# Altium PCB PCB1.PcbDoc
Units mil, origin at the board's own origin, x right, y up, seen from the top; angles counter-clockwise.
Board outline 2400 x 3960 mil, 2 copper layers (Top Layer, Bottom Layer), stack 61.756 mil thick; 52 components, 26 nets, 137 pads, 5 vias.
Unrouted connection lines stored in the file: 2.
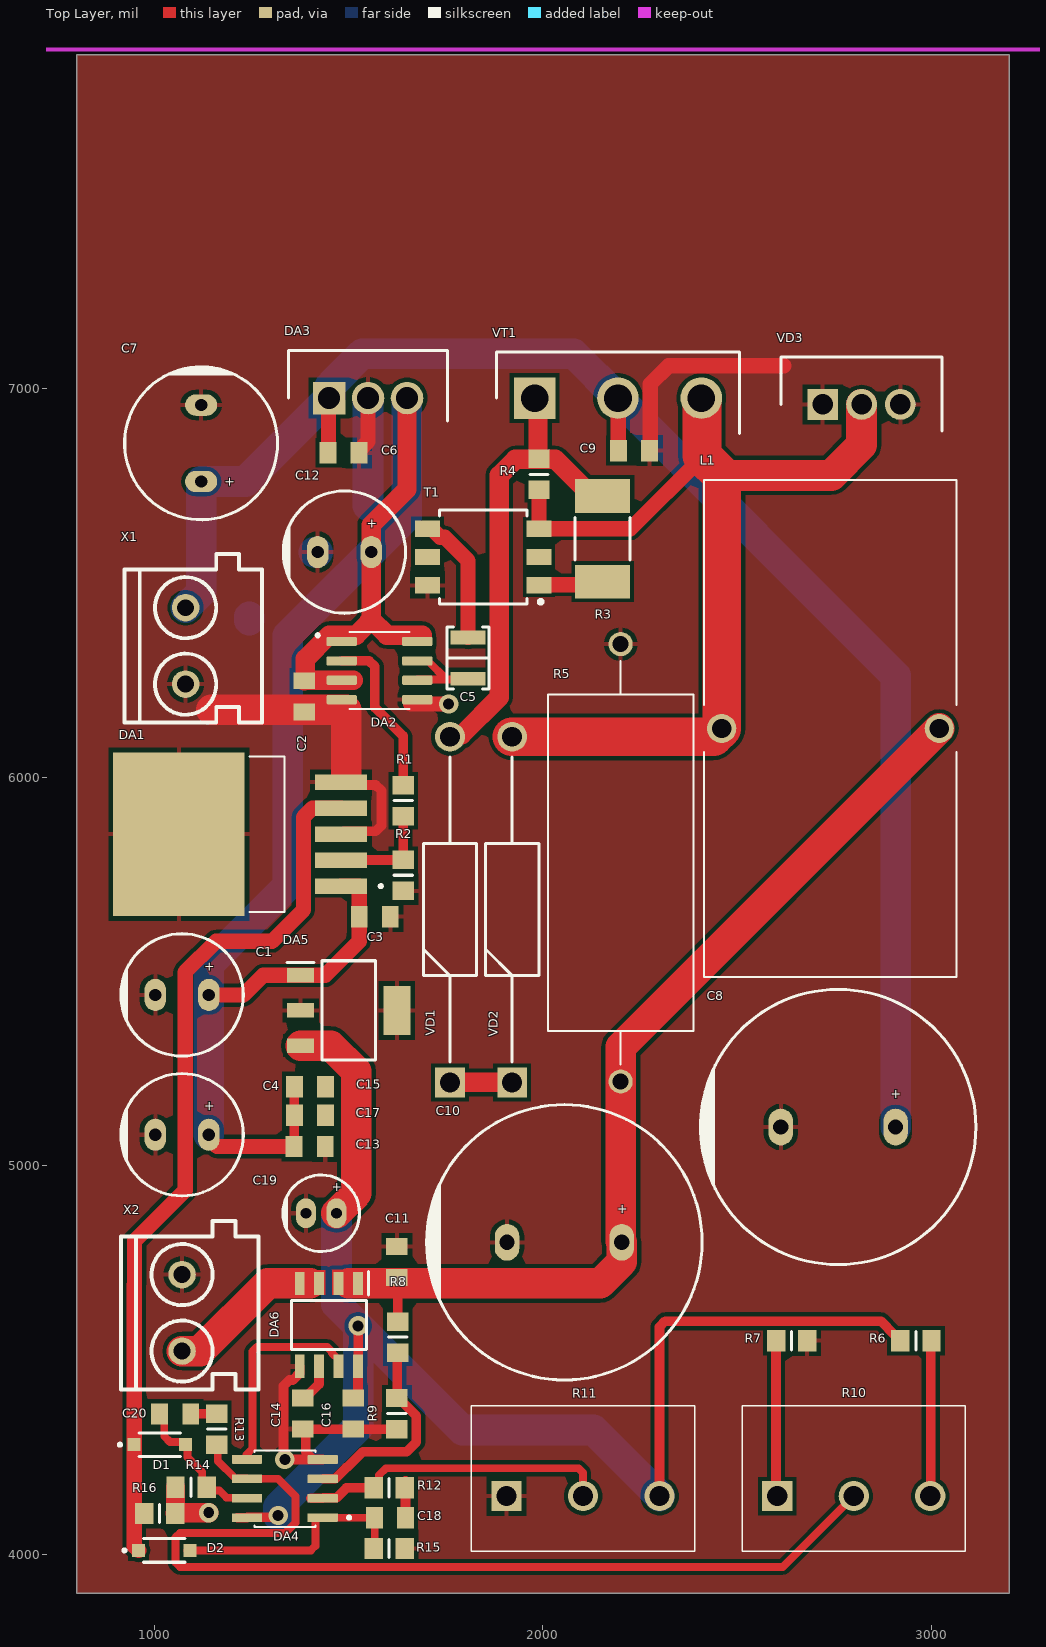
[diagram p0: Top Layer view]
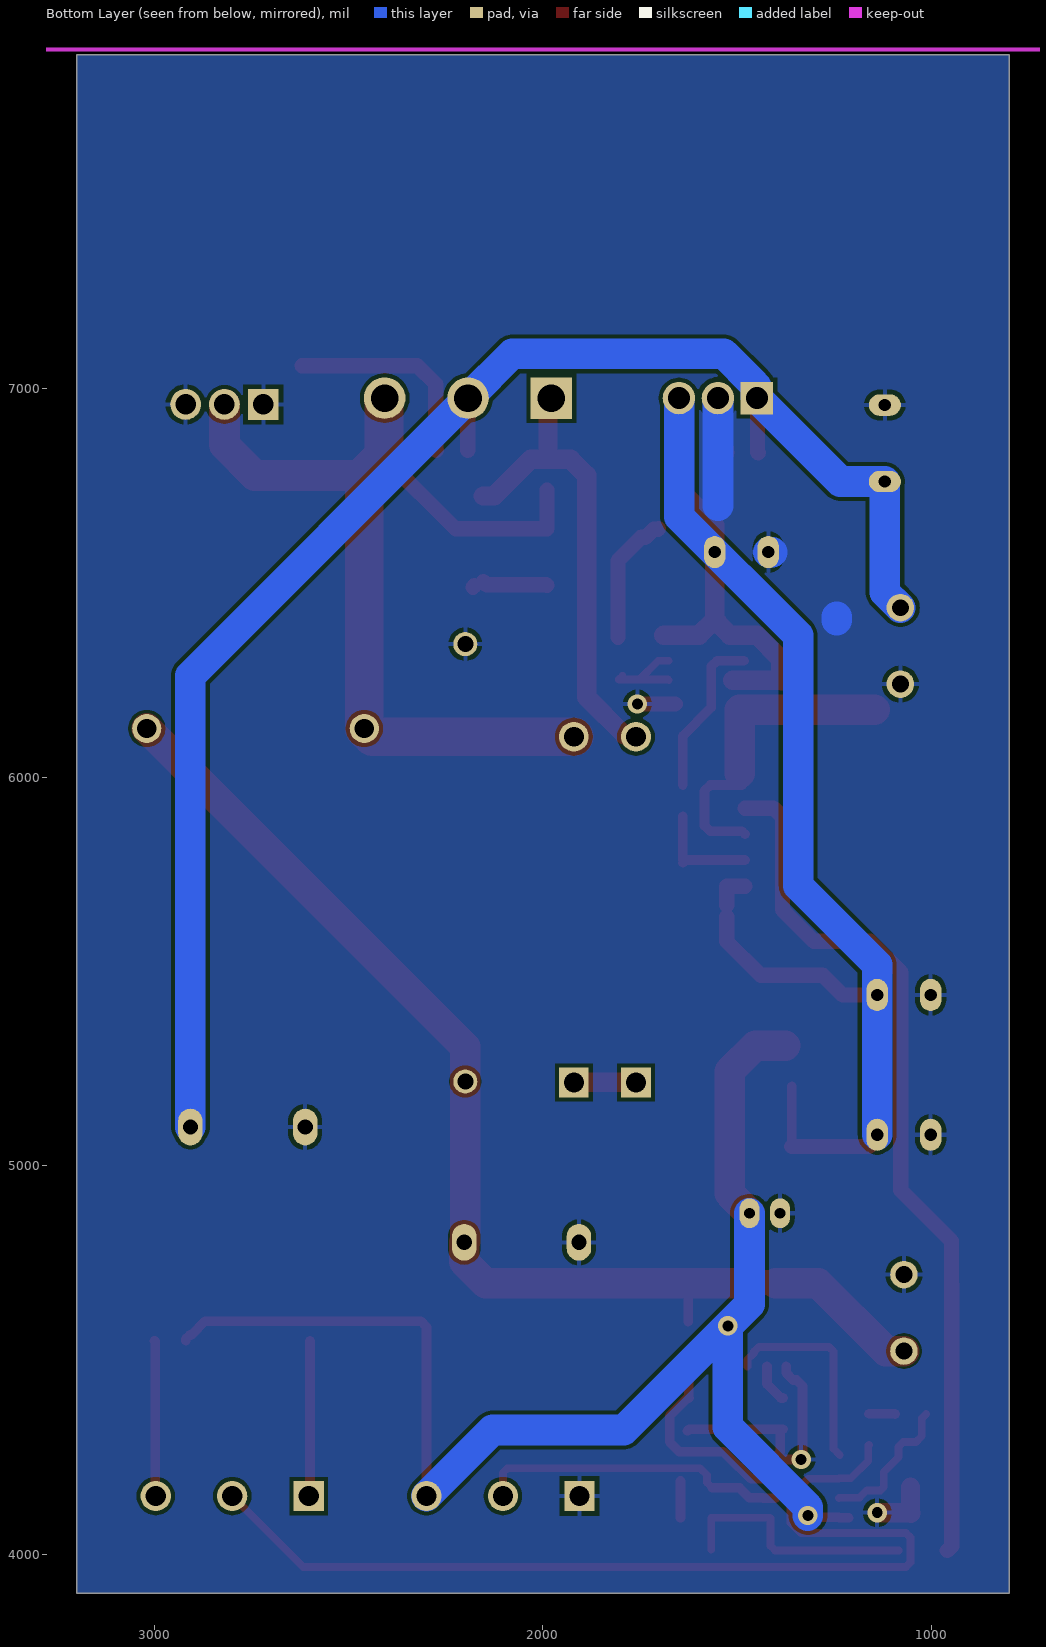
[diagram p1: Bottom Layer view, seen from below]
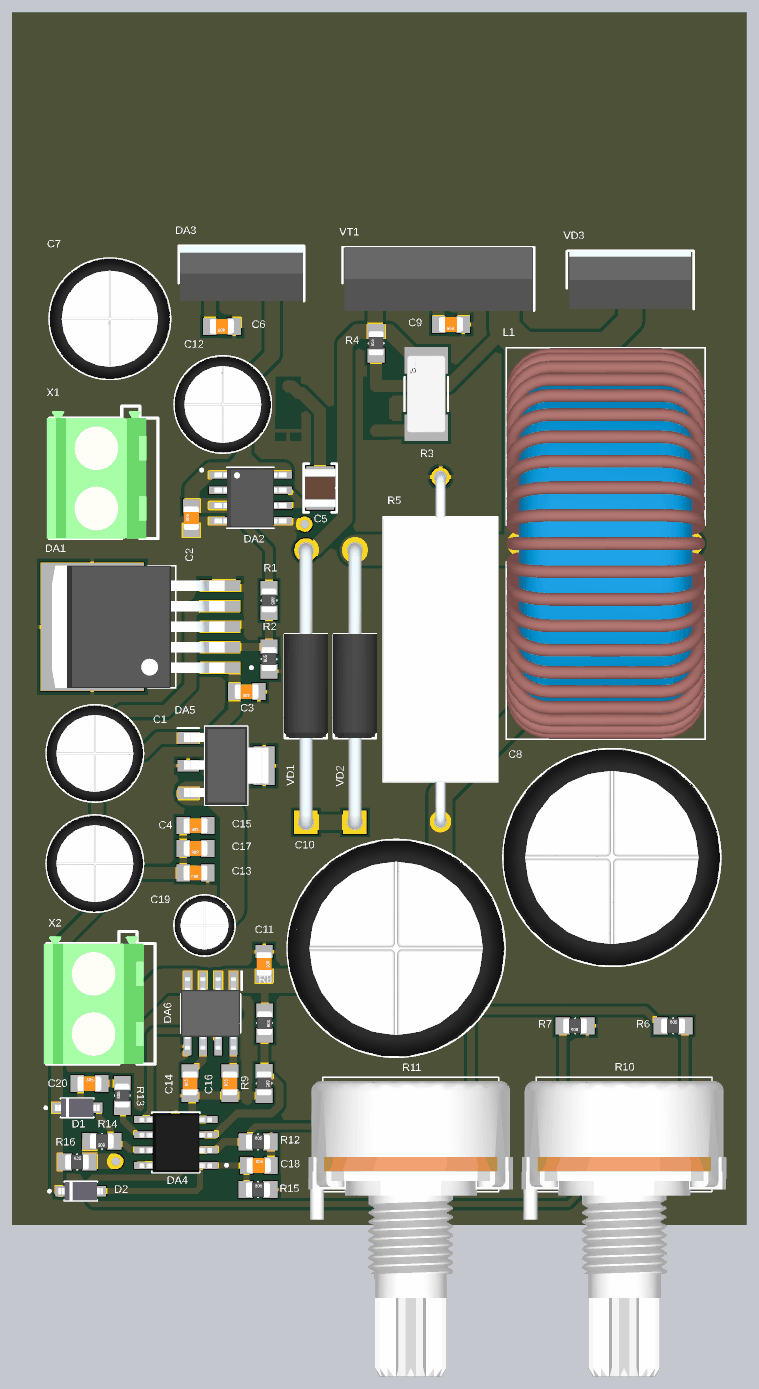
[diagram p2: 3D render of the assembled board from above, using the file's embedded part models]

## Layer stack, top to bottom
Top Solder: solder mask 0.3937, Solder Resist, Dk 3.5
Top Layer: signal copper 1.3778
Dielectric 1: core 59, Core-043, Dk 4.3
Bottom Layer: signal copper 1.3778
Bottom Solder: solder mask 0.3937, Solder Resist, Dk 3.5

## Board outline
800,3900 800,7860 3200,7860 3200,3900

## Design rules (kind name [scope] priority, off if disabled: settings)
Clearance [All] p1: gap=10 ignorepadtopadclearanceinfootprint=FALSE
ComponentClearance [All] p1 off: gap=10 collisioncheckmode=3 verticalgap=10 showdistances=FALSE
Height [All] p1 off: minheight=0 maxheight=1000 prefheight=500
PolygonConnect [All] p1: connectstyle=Relief reliefconductorwidth=11.81 reliefentries=4 polygonreliefangle="90 Angle" airgapwidth=11.81
RoutingVias [All] p1: holewidth=28 width=50 viastyle="Through Hole" minholewidth=28 minwidth=50 maxholewidth=28 maxwidth=50
SolderMaskExpansion [All] p1: expansion=4 istentingtop=FALSE
Width [All] p1: maxlimit=118.11 minlimit=10 preferedwidth=10
28 further rules are at their usual default settings.

## Components (designator, comment, footprint, x,y, rotation, side; value= is the part's Value field where it differs from the comment)
C1 "100 мкФ" "CAP TH ALUM ELEC D8.00mm S3.50mm H12.50mm" 1070.91,5440 r0 top value=100µF
C2 "100 нФ" CAPC2012L-С0805 1385.83,6208.66 r90 top value="0,1 мкФ"
C3 "100 нФ" CAPC2012L-С0805 1566.93,5641.73 r180 top value="0,1 мкФ"
C4 "100 мкФ" "CAP TH ALUM ELEC D8.00mm S3.50mm H12.50mm" 1070.91,5080 r0 top value=100µF
C5 "1 мкФ" "CAP FILM 1210" 1807.09,6307.09 r270 top value="1 µF"
C6 "100 нФ" CAPC2012L-С0805 1486.22,6835.38 r180 top value="0,1 мкФ"
C7 "470 мкФ" "CAP TH ALUM ELEC D10.00mm S5.00mm H10.50mm" 1120,6860 r270 top value=470µF
C8 "2200 мкФ" "CAP TH ALUM ELEC D18.00mm S7.50mm H42.00mm" 2760,5100 r0 top value=2200µF
C9 "100 нФ" CAPC2012L-С0805 2234.25,6841.29 r180 top value="0,1 мкФ"
C10 "2200 мкФ" "CAP TH ALUM ELEC D18.00mm S7.50mm H42.00mm" 2055.12,4803.15 r0 top value=2200µF
C11 "100 нФ" CAPC2012L-С0805 1624.02,4752.66 r270 top value="0,1 мкФ"
C12 "100 мкФ" "CAP TH ALUM ELEC D8.00mm S3.50mm H12.50mm" 1488.9,6580 r0 top value=100µF
C13 "100 нФ" CAPC2012L-С0805 1399.37,5049.73 r180 top value="0,1 мкФ"
C14 "1 нФ" CAPC2012L-С0805 1381.89,4362.2 r90 top value="0,1 мкФ"
C15 "100 нФ" CAPC2012L-С0805 1400.01,5204.06 r180 top value="0,1 мкФ"
C16 "100 нФ" CAPC2012L-С0805 1511.81,4362.2 r90 top value="0,1 мкФ"
C17 "100 нФ" CAPC2012L-С0805 1400.01,5129.73 r180 top value="0,1 мкФ"
C18 "1 мкФ" CAPC2012L-С0805 1606.3,4094.29 r0 top value="0,1 мкФ"
C19 "10 мкФ" "CAP TH ALUM ELEC D5.00mm S2.00mm H11.00mm" 1429.13,4877.95 r0 top value=10µF
C20 "1 мкФ" CAPC2012L-С0805 1053.15,4361.22 r0 top value="0,1 мкФ"
D1 "1N4148W" 1N4148WVGS08 1013.15,4282.2 r0 top
D2 "1N4148W" 1N4148WVGS08 1024.94,4010 r0 top
DA1 "LM2576" LM2576 1062.68,5853.86 r180 top
DA2 "UCC27322" SOIC127P599X175-8N 1579.09,6275 r0 top
DA3 "L7815" TO255P460X1020X2030-3P 1449.21,6976.38 r0 top
DA4 "LM358" SOIC127P600X175-8N#1 1335.53,4169.29 r180 top
DA5 "LM7805" SOT230P700X180-4N 1500,5400 r0 top
DA6 "ACS712" SOIC127P600X175-8N#2 1448.82,4590.55 r270 top
L1 "200uH" IND_HCTI-220-5.8 2740,6125.86 r0 top
R1 "100 Ом" RESC2012N 1640,5940 r270 top value=1кОм
R2 "1 кОм" RESC2012N 1640,5748.03 r90 top value=1кОм
R3 "10 Ом" FP-MCS3264-IPC_A 2153.54,6614.17 r90 top
R4 "10 кОм" RESC2012N 1989.77,6780 r90 top value=1кОм
R5 "1 кОм" RESAD2860W80L2200D950 2200,5780 r270 top
R6 "10 кОм" RESC2012N 2960,4550 r0 top value=1кОм
R7 "47 кОм" RESC2012N 2640,4550 r180 top value=1кОм
R8 "5 кОм" RESC2012N 1625.98,4559.06 r270 top value=1кОм
R9 "1 кОм" RESC2012N 1624.02,4362.2 r270 top value=1кОм
R10 "50 кОм" PDB181K220K104B 2603.15,4150 r270 top
R11 "50 кОм" PDB181K220K104B 1906.3,4150 r270 top
R12 "1 кОм" RESC2012N 1604,4171 r0 top value=1кОм
R13 "50 Ом" RESC2012N 1160.56,4322.2 r90 top value=1кОм
R14 "10 кОм" RESC2012N 1094.02,4173.09 r180 top value=1кОм
R15 "10 кОм" RESC2012N 1604,4015 r0 top value=1кОм
R16 "1 кОм" RESC2012N 1013.15,4105.07 r0 top value=1кОм
T1 "15:35" WE-GDT_EP5 -48153.73,-43432.83 r180 top
VD1 "1N5355B" DIOAD2260W109L864D349 1760.62,5214.83 r90 top
VD2 "1N5355B" DIOAD2260W109L864D349 1920.62,5214.83 r90 top
VD3 "MBR40250" TO254P483X1010X2035-3P 2720,6960 r0 top
VT1 "IRFP250N" TO545P530X1560X2460-3P 1978.43,6976.38 r0 top
X1 "" KLEMNIK2 1080,6240 r90 top
X2 "" KLEMNIK2 1070.76,4523.15 r90 top

## Footprints (in the part's own frame and the unit in brackets; to place one, negate y for a bottom-side part, rotate by r counter-clockwise, add the part's x,y. Pads: shape width x height; smd on the part's side, far side on the other; paste and mask are expansions set on the pad)
1N4148WVGS08 [mm]
  rect 0.85x0.85 smd: 1(-1.675,0) 2(1.675,0)
  silkscreen extent -2.7,-0.77 1.35,0.77, body extent -1.85,-0.77 1.85,0.77, height 1.26
"CAP FILM 1210" [mm] "G2, Film Capacitor PPS, 2-Leads, Body 3.20x2.50mm, IPC Medium Density"
  rect 0.9x2.3 smd: 1(-1.35,0) 2(1.35,0)
  silkscreen extent -2.02,-1.38 2.02,1.38, body extent -1.6,-1.25 1.6,1.25, height 1.6
"CAP TH ALUM ELEC D5.00mm S2.00mm H11.00mm" [mm] "5mm Diameter 2mm Lead Spacing Aluminum Electrolytic Capacitors Radial, Can"
  oval 1.3x1.95 hole 0.7: 1(1,0) 2(-1,0)
  silkscreen extent -2.5,-2.5 2.5,2.5, body extent -2.51,-2.5 2.5,2.5, height 11
"CAP TH ALUM ELEC D8.00mm S3.50mm H12.50mm" [mm] "8mm Diameter 3.5mm Lead Spacing Aluminum Electrolytic Capacitors Radial, Can"
  oval 1.4x2.1 hole 0.8: 1(1.75,0) 2(-1.75,0)
  silkscreen extent -4,-4 4,4, body extent -4.01,-4 4,4, height 12.5
"CAP TH ALUM ELEC D10.00mm S5.00mm H10.50mm" [mm] "10mm Diameter 5mm Lead Spacing Aluminum Electrolytic Capacitors Radial, Can"
  oval 1.4x2.1 hole 0.8: 1(2.5,0) 2(-2.5,0)
  silkscreen extent -5,-5 5,5, body extent -5.01,-5 5,5, height 10.5
"CAP TH ALUM ELEC D18.00mm S7.50mm H42.00mm" [mm] "18mm Diameter 7.5mm Lead Spacing Aluminum Electrolytic Capacitors Radial, Can"
  oval 1.6x2.4 hole 1: 1(3.75,0) 2(-3.75,0)
  silkscreen extent -9,-9 9,9, body extent -9,-9 9,9, height 42
CAPC2012L-С0805 [mm] "Chip Capacitor, Body 2.0x1.3mm, IPC High Density"
  rect 1.1x1.4 smd: 1(-1.016,0) 2(1.016,0)
  body extent -1,-0.62 1,0.63, height 0.78
DIOAD2260W109L864D349 [mm]
  rect 1.95x1.95 hole 1.3: 1(0,0)
  round 1.95 hole 1.3: 2(22.6,0)
  silkscreen extent 1.33,-1.75 21.27,1.75, body extent -0.55,-1.84 23.14,1.84, height 3.67
FP-MCS3264-IPC_A [mil]
  rect 86.74x141.9 smd paste+0 mask+0: 1(-110.25,0) 2(110.25,0)
  silkscreen extent -55,-71 55,71, body extent -173,-91 173,91, height 10
IND_HCTI-220-5.8 [mil]
  round 75 hole 50: 1(-280,0) 2(280,0)
  silkscreen extent -325,-640 325,640, body extent -325,-638 325,638, height 1362
KLEMNIK2 [mm]
  round 1.8 hole 1.1: 1(0,0) 2(5,0)
  silkscreen extent -2.5,-5 8.5,4, body extent -2.5,-4.05 8.1,4.25, height 9.99
LM2576 [mm]
  rect 3.4x1 smd paste-0.05 mask+0.07: 1(-10.6,3.4) 2(-10.6,1.7) 3(-10.6,0) 4(-10.6,-1.7) 5(-10.6,-3.4)
  rect 8.6x10.7 smd paste-0.05 mask+0.07: 6(0,0)
  silkscreen extent -13.3,-5.08 -4.62,5.08, body extent -10.99,-5.08 3.37,5.08, height 4.65
PDB181K220K104B [mm]
  rect 1.98x1.98 hole 1.32: 1(0,0)
  round 1.98 hole 1.32: 2(0,5) 3(0,10)
  silkscreen extent -5.9,-2.3 3.6,12.3, body extent -5.58,-3.5 18.92,13.49, height 21.2
RESAD2860W80L2200D950 [mm]
  round 1.575 hole 1.05: 1(-14.3,0) 2(14.3,0)
  silkscreen extent -13.19,-4.75 13.19,4.75, body extent -14.7,-4.75 14.7,4.75, height 10
RESC2012N [mm] "Chip Resistor, Body 2.0x1.3mm, IPC Medium Density"
  rect 1.2x1.4 smd: 1(-1.016,0) 2(1.016,0)
  silkscreen extent 0,-0.6 0,0.6, body extent -1,-0.62 1,0.63, height 0.78
SOIC127P599X175-8N [mm]
  rrect25% 1.97x0.6 smd: 1(-2.47,1.905) 2(-2.47,0.635) 3(-2.47,-0.635) 4(-2.47,-1.905) 5(2.47,-1.905) 6(2.47,-0.635) 7(2.47,0.635) 8(2.47,1.905)
  silkscreen extent -4.14,-2.52 1.95,2.52, body extent -3,-2.45 3,2.45, height 1.75
SOIC127P600X175-8N#1 [mm]
  rrect14% 1.97x0.57 smd: 1(-2.475,1.905) 2(-2.475,0.635) 3(-2.475,-0.635) 4(-2.475,-1.905) 5(2.475,-1.905) 6(2.475,-0.635) 7(2.475,0.635) 8(2.475,1.905)
  silkscreen extent -4.3,-2.5 2,2.5, body extent -3,-2.41 3,2.49, height 1.53
SOIC127P600X175-8N#2 [mm]
  rect 1.525x0.65 smd: 1(-2.712,1.905) 2(-2.712,0.635) 3(-2.712,-0.635) 4(-2.712,-1.905) 5(2.712,-1.905) 6(2.712,-0.635) 7(2.712,0.635) 8(2.712,1.905)
  silkscreen extent -3.47,-2.45 1.6,2.58, body extent -3,-2.45 3,2.45, height 1.75
SOT230P700X180-4N [mm]
  rect 1.75x0.95 smd: 1(-3.15,2.3) 2(-3.15,0) 3(-3.15,-2.3)
  rect 1.75x3.2 smd: 4(3.15,0)
  silkscreen extent -4.03,-3.25 1.75,3.25, body extent -3.5,-3.25 3.5,3.25, height 1.68
TO254P483X1010X2035-3P [mm]
  rect 2.01x2.01 hole 1.34: 1(0,0)
  round 2.01 hole 1.34: 2(2.54,0) 3(5.08,0)
  silkscreen extent -2.73,-1.74 7.81,3.1, body extent -2.51,-1.74 7.59,3.1, height 18.56
TO255P460X1020X2030-3P [mm]
  rect 2.13x2.13 hole 1.42: 1(0,0)
  round 2.13 hole 1.42: 2(2.55,0) 3(5.1,0)
  silkscreen extent -2.65,-1.5 7.75,3.1, body extent -2.55,-1.5 7.65,3.1, height 19.4
TO545P530X1560X2460-3P [mm]
  rect 2.715x2.715 hole 1.81: 1(0,0)
  round 2.715 hole 1.81: 2(5.45,0) 3(10.9,0)
  silkscreen extent -2.5,-2.3 13.4,3, body extent -2.35,-2.3 13.25,3, height 24
WE-GDT_EP5 [mm] "Gate-Drive-Transformer, size EP5"
  rect 1.63x1.07 smd: 1(-1273.645,-1268.15) 2(-1273.645,-1270) 3(-1273.645,-1271.85) 4(-1266.355,-1271.85) 5(-1266.355,-1270) 6(-1266.355,-1268.15)
  silkscreen extent -1273.88,-1273.08 -1267.15,-1266.92, body extent -1273.85,-1273.07 -1266.15,-1266.92, height 5.1

## Part data
C1 C4 C12: library part "Polarised Capacitor_2", "CAP ALUM 100UF 20% 25V RADIAL", Capacitance=100µF, Device Package="Radial, Can", Lifetime @ Temp.="1000 Hrs @ 105°C", manufacturer=Nichicon, Operating Temperature="-40°C ~ 105°C", Part Number=UKL1E101KPDANATD, Ripple Current @ High Frequency="420mA @ 10kHz", Ripple Current @ Low Frequency="280mA @ 120Hz", Supplier Part Number 1=493-15360-1-ND, Tolerance=±10%, Voltage - Rated=25V, Applications="General Purpose", componentlink1description=Datasheet, componentlink1url=http://nichicon-us.com/english/products/pdfs/e-ukl.pdf, componentlink2description="DigiKey Link", componentlink2url=http://digikey.com/product-detail/en/nichicon/UKL1E101KPDANATD/493-15360-1-ND/6555998, Height - Seated (Max)="0.492\" (12.50mm)", lastupdated="07.09.2020 5:24:52", Lead Spacing="0.138\" (3.50mm)", Lifecycle Status=Active, Minimum Order=1, Mounting Type="Through Hole", Package / Case="Radial, Can", packaging=TapeAndBox, Part Status=Active, partid=7205, Polarization=Polar, price=0.16, series=UKL, Size / Dimension="0.315\" Dia (8.00mm)", Supplier 1=DigiKey
C2 C3 C6 C9 C11 C13 C14 C15 C16 C17 C18 C20: library part C0805, "планарный конденсатор"
C5: library part Capacitor_1, "CAP FILM 1UF 20% 35VDC 1210", Device Package="1210 (3225 Metric)", Dielectric Material="Acrylic, Metallized", manufacturer=Rubycon, Operating Temperature="-55°C ~ 125°C", Part Number=35MU105MB13225, Supplier Part Number 1=1189-2529-1-ND, Tolerance=±20%, Voltage Rating - DC=35V, Applications="DC Link, DC Filtering", Capacitance="1 мкФ", componentlink1description=Datasheet, componentlink1url=http://www.rubycon.co.jp/en/catalog/e_pdfs/pmlcap/e_MU.pdf, componentlink2description="DigiKey Link", componentlink2url=https://www.digikey.com/en/products/detail/rubycon/35MU105MB13225/4969535, Height - Seated (Max)="0.063\" (1.60mm)", lastupdated="01.11.2023 20:43:30", Lifecycle Status=Active, Minimum Order=1, Mounting Type="Surface Mount", Package / Case="1210 (3225 Metric)", packaging=TapeAndReel, Part Status=Active, price=2.41, series="PMLCAP®, MU", Size / Dimension="0.126\" L x 0.098\" W (3.20mm x 2.50mm)", Supplier 1=DigiKey, Termination="Solder Pads"
C7: library part "Polarised Capacitor_3", "CAP ALUM 470UF 20% 25V RADIAL", Capacitance=470µF, Device Package="Radial, Can", Lifetime @ Temp.="2000 Hrs @ 85°C", manufacturer=Rubycon, Operating Temperature="-40°C ~ 85°C", Part Number=25WA470MEFCT810X9, Ripple Current @ Low Frequency="460mA @ 120Hz", Supplier Part Number 1=1189-3717-1-ND, Tolerance=±20%, Voltage - Rated=25V, Applications="General Purpose", componentlink1description=Datasheet, componentlink1url=http://www.rubycon.co.jp/en/catalog/e_pdfs/aluminum/e_wa.pdf, componentlink2description="DigiKey Link", componentlink2url=http://digikey.com/product-detail/en/rubycon/25WA470MEFCT810X9/1189-3717-1-ND/6599186, Height - Seated (Max)="0.413\" (10.50mm)", lastupdated="02.09.2020 1:26:22", Lead Spacing="0.197\" (5.00mm)", Lifecycle Status=Active, Minimum Order=1, Mounting Type="Through Hole", Package / Case="Radial, Can", packaging=TapeAndBox, Part Status=Active, partid=9499, Polarization=Polar, price=0.17, series=WA, Size / Dimension="0.394\" Dia (10.00mm)", Supplier 1=DigiKey
C8 C10: library part "Polarised Capacitor", "CAP ALUM 2200UF 20% 50V RADIAL", Capacitance=2200µF, Device Package="Radial, Can", Lifetime @ Temp.="4000 Hrs @ 130°C", manufacturer=Rubycon, Operating Temperature="-40°C ~ 130°C", Part Number=50RX302200M18X40, Ratings=AEC-Q200, Ripple Current @ High Frequency="2.8A @ 100kHz", Ripple Current @ Low Frequency="2.24A @ 120Hz", Supplier Part Number 1=1189-1410-ND, Tolerance=±20%, Voltage - Rated=50V, Applications=Automotive, componentlink1description=Datasheet, componentlink1url=http://www.rubycon.co.jp/en/catalog/e_pdfs/aluminum/e_rx30.pdf, componentlink2description="DigiKey Link", componentlink2url=http://digikey.com/product-detail/en/rubycon/50RX302200M18X40/1189-1410-ND/3134366, Height - Seated (Max)="1.654\" (42.00mm)", Impedance="29 mOhms", lastupdated="02.09.2020 1:33:35", Lead Spacing="0.295\" (7.50mm)", Lifecycle Status=Active, Minimum Order=1, Mounting Type="Through Hole", Package / Case="Radial, Can", packaging=Bulk, Part Status=Active, partid=9389, Polarization=Polar, price=3.85, series=RX30, Size / Dimension="0.709\" Dia (18.00mm)", Supplier 1=DigiKey
C19: library part "Polarised Capacitor_1", "CAP ALUM 10UF 20% 16V RADIAL", Capacitance=10µF, Device Package="Radial, Can", Lifetime @ Temp.="2000 Hrs @ 105°C", manufacturer=Nichicon, Operating Temperature="-55°C ~ 105°C", Part Number=UPW1C100MDD, Ripple Current @ High Frequency="180mA @ 100kHz", Ripple Current @ Low Frequency="54mA @ 120Hz", Supplier Part Number 1=493-1767-ND, Tolerance=±20%, Voltage - Rated=16V, Applications="General Purpose", componentlink1description=Datasheet, componentlink1url=http://nichicon-us.com/english/products/pdfs/e-upw.pdf, componentlink2description="DigiKey Link", componentlink2url=http://digikey.com/product-detail/en/nichicon/UPW1C100MDD/493-1767-ND/589508, Height - Seated (Max)="0.433\" (11.00mm)", Impedance="600 mOhms", lastupdated="04.09.2020 23:28:56", Lead Spacing="0.079\" (2.00mm)", Lifecycle Status=Active, Minimum Order=1, Mounting Type="Through Hole", Package / Case="Radial, Can", packaging=Bulk, Part Status=Active, partid=21402, Polarization=Polar, price=0.26, series=UPW, Size / Dimension="0.197\" Dia (5.00mm)", Supplier 1=DigiKey
D1 D2: library part 1N4148W-V-GS08, "Diode", Manufacturer_Name=Vishay, Mouser Part Number=625-1N4148W-V, Arrow Part Number=1N4148W-V-GS08, Arrow Price/Stock=https://www.arrow.com/en/products/1n4148w-v-gs08/vishay, Datasheet Link=https://us.rs-online.com/m/d/a2789c8794cb0c42ced29f2dd8571f3c.pdf, Height=1.35mm, Manufacturer_Part_Number=1N4148W-V-GS08, Mouser Price/Stock=https://www.mouser.co.uk/ProductDetail/Vishay-Semiconductors/1N4148W-V-GS08?qs=TNTIDjy6APrS%2Fdgq1RSs3A%3D%3D
DA1: library part LM2576-ADJ, "Buck-boost converter"
DA2: "Single 9-A High-Speed Low-Side Mosfet Driver With Enable"
DA3: library part L7815CP, "15 V Linear stab", Manufacturer_Name=STMicroelectronics, Mouser Part Number=511-L7815CP, Arrow Part Number=L7815CP, Arrow Price/Stock=https://www.arrow.com/en/products/l7815cp/stmicroelectronics?region=europe, Datasheet Link=http://www.st.com/web/en/resource/technical/document/datasheet/CD00000444.pdf, Height=4.6mm, Manufacturer_Part_Number=L7815CP, Mouser Price/Stock=https://www.mouser.co.uk/ProductDetail/STMicroelectronics/L7815CP?qs=%252BX2uje6VeKVI9cfwuCNq4A%3D%3D
DA4: "OP AMP"
DA5: library part LM7805MPX_NOPB, "5 V Linear stab", Arrow Part Number=LM7805MPX/NOPB, Manufacturer_Name="Texas Instruments", Mouser Part Number=595-LM7805MPX/NOPB, Arrow Price/Stock=https://www.arrow.com/en/products/lm7805mpxnopb/texas-instruments?region=nac, Datasheet Link=https://www.arrow.com/en/products/lm7805mpxnopb/texas-instruments, Height=1.8mm, Manufacturer_Part_Number=LM7805MPX/NOPB, Mouser Price/Stock=https://www.mouser.co.uk/ProductDetail/Texas-Instruments/LM7805MPX-NOPB?qs=gO6GG99qvRCSwIVAoVKHPw%3D%3D
DA6: library part ACS712ELCTR-05B-T, "ampermeter ic", Manufacturer_Name="Sharp Microelectronics", Datasheet Link=https://www.allegromicro.com/~/media/Files/Datasheets/ACS712-Datasheet.ashx, Height=1.75mm, Manufacturer_Part_Number=ACS712ELCTR-05B-T
L1: library part Inductor
R1 R2 R4 R6 R7 R8 R9 R12 R13 R14 R15 R16: library part R0805, "планарный резистор"
R3: library part "Resistor 2W", "2W"
R5: library part "Resistor 5W", "5W"
R10 R11: library part PDB181-K420K-105A2, "Variable Resistor", Manufacturer_Name=Bourns, Mouser Part Number=652-PDB181K420K105A2, Arrow Part Number=PDB181-K420K-105A2, Arrow Price/Stock=https://www.arrow.com/en/products/pdb181-k420k-105a2/bourns?region=nac, Datasheet Link=https://www.bourns.com/docs/product-datasheets/PDB18.pdf, Height=16.5mm, Manufacturer_Part_Number=PDB181-K420K-105A2, Mouser Price/Stock=https://www.mouser.co.uk/ProductDetail/Bourns/PDB181-K420K-105A2?qs=HVbQlW5zcXUfmN1nKSXlOQ%3D%3D
T1: library part Transformer
VD1 VD2: "Zener Diode", Manufacturer_Name=Galaxy, Datasheet Link=https://www.onsemi.com/pdf/datasheet/1n5333b-d.pdf, Manufacturer_Part_Number=1N5355B
VD3: library part MBR40250TG, "Shootky Diode", Manufacturer_Name=onsemi, Mouser Part Number=863-MBR40250TG, Arrow Part Number=MBR40250TG, Arrow Price/Stock=https://www.arrow.com/en/products/mbr40250tg/on-semiconductor?region=nac, Datasheet Link=http://www.onsemi.com/pub/Collateral/MBR40250-D.PDF, Height=4.83mm, Manufacturer_Part_Number=MBR40250TG, Mouser Price/Stock=https://www.mouser.co.uk/ProductDetail/onsemi/MBR40250TG?qs=3JMERSakebr9LpXNBMS%2FzA%3D%3D
VT1: "MOSFET (N-Channel)", Manufacturer_Name=Infineon, Mouser Part Number=N/A, Datasheet Link=https://www.infineon.com/dgdl/Infineon-IRFP250N-DataSheet-v01_01-EN.pdf?fileId=5546d462533600a4015356288b8b1fde, Height=5.3mm, Manufacturer_Part_Number=IRFP250N, Mouser Price/Stock=https://www.mouser.co.uk/ProductDetail/Infineon-IR/IRFP250N?qs=Gkr2N%2F2q3o3iFaFA442Z6g%3D%3D
X1 X2: library part KLEMMNIK2

## Via types
v1: diameter 50, hole 28, Top Layer to Bottom Layer, 5 vias

## Nets (pads, with @x,y where several pads share a name; then routed paths per layer and width w, separated by ;. In a path a pad name is that pad's centre, name@x,y a point inside that pad or via, vN(x,y) a via of type N, cw(c..) or ccw(c..) an arc to the next point about the centre after c; other vN are vias at no path point)
GND: C1.2 C2.1 C3.1 C4.2 C6.1 C7.2 C8.2 C9.1 C10.2 C11.1 C12.2 C13.1 C14.1 C15.1 C16.1 C17.1 C19.2 DA1.3 DA1.5 DA1.6 DA2.4 DA2.5 DA3.2 DA4.4 DA5.2 DA5.4 DA6.5 R2.1 R5.1 R7.1 R9.2 R11.1 R14.2 R15.2 R16.2 T1.6 VD3.1 VD3.3 X1.1 X2.2 | length 2783.9
  Top Layer w25: DA6.5 1373.82,4466.56 1355.85,4448.58 1347.23,4448.58 1331.83,4433.18 1331.83,4247.8 v1(1335.53,4244.09) 1335.63,4244.19 1432.88,4244.19 DA4.4 1407.98,4244.29 1389.22,4263.05 1389.22,4314.88 C14.1 C16.1 R9.2 R9.2@1628.13,4318.09 ; DA1.3 1487.19,5861.04 1569.36,5861.04 1584,5875.69 1584,5965.89 1569.36,5980.53 1487.19,5980.53 DA1.5
  Top Layer w39.37: C6.1 1528.19,6837.35 1528.19,6843.26 1549.61,6864.67 DA3.2 ; DA2.5@1659.27,6189 v1(1757,6189) ; C9.1 2276.13,6843.17 2276.13,7012.35 2323.29,7059.51 2620.49,7059.51
  Top Layer w50: R16.2 1053.15,4105.82 R16.2@1054.02,4106.69 ; R14.2 R16.2@1054.02,4106.69 ; v1(1139.71,4107.2) 1054.53,4107.2 R16.2@1054.02,4106.69
  Top Layer w78.74: 1146,6174 1493,6174 1493,6011
  Bottom Layer w78.74: 1244.09,6404.09 1244.09,6413.94 ; C12.2@1410.16,6580 C12.2 ; 1549.61,6699.76 DA3.2
NetC5_1: C5.1 T1.4 | length 336
  Top Layer w39.37: T1.4 1704.14,6638.62 1715.17,6638.62 1735.87,6617.91 1747.15,6617.91 1807.09,6557.97 C5.1
NetC5_2: C5.2 DA2.6 DA2.7 | length 238.4
  Top Layer w20: DA2.6 1678.14,6251.81 1751.49,6251.81 ; DA2.7 1703.3,6300 1751.49,6251.81 ; C5.2@1795.12,6261.65 1804.96,6251.81 1751.49,6251.81
NetC10_1: C10.1 C11.2 DA6.1 DA6.2 L1.2 R5.2 R8.1 | length 2538.8
  Top Layer w25: C11.2@1624.02,4697.32 1625.98,4695.35 R8.1
  Top Layer w78.74: 1500,4697.32 DA6.1 1624.02,4697.32 2147.42,4697.32 2202.76,4752.66 C10.1 2200,4805.91 R5.2 2200,5305.86 L1.2
NetC14_2: C14.2 DA6.6 | length 102.4
  Top Layer w25: C14.2 1387.8,4402.2 1423.52,4437.93 1423.52,4483.48 DA6.6
NetC18_1: C18.1 D2.2 DA4.1 R15.1 | length 641.6
  Top Layer w20: D2.2@1084.02,4010 1402.46,4010 1414.18,4021.72 1414.18,4093.07 1415.4,4094.29 DA4.1 C18.1 1566.65,4093.94 1566.65,4012.35 R15.1@1567,4012
NetC18_2: C18.2 R12.2 | length 94.7
  Top Layer w25: C18.2 R12.2@1646.3,4188.98
NetC20_1: C20.1 D1.2 DA4.7 R14.1 | length 380
  Top Layer w20: C20.1 1024.8,4349.57 1024.8,4303.94 1039.8,4288.94 1072.36,4288.94 1084.7,4276.6 1084.7,4249.82 1122.6,4211.92 1122.6,4173.09 1131.24,4164.46 1166.6,4164.46 1185.55,4145.51 1236.87,4145.51 DA4.7
NetC20_2: C20.2 R13.2 | length 67.8
  Top Layer w25: C20.2 1093.64,4361.71 1160.07,4361.71 R13.2
NetD1_1: D1.1 D2.1 DA1.4 R16.1 | length 2263.4
  Top Layer w39.37: D2.1 947.88,4021.12 947.88,4693.31 948.19,4693.62 948.19,4806.46 1078.74,4937.01 1078.74,5498.53 1158.32,5578.11 1302.52,5578.11 1383.39,5658.98 1383.39,5897.72 1406.45,5920.79 DA1.4
NetDA1_2: DA1.2 R1.2 R2.2 | length 275.3
  Top Layer w25: DA1.2 1480.55,5787.48 1632.52,5787.48 R2.2@1640,5780 ; R2.2 R1.2
NetDA2_2: DA2.2 R1.1 | length 426.8
  Top Layer w25: DA2.2 1552.28,6300 1566.93,6285.36 1566.93,6179.73 1640,6106.66 R1.1
NetDA4_2: DA4.2 R11.2 R12.1 | length 776.5
  Top Layer w20: R12.1 1577.62,4184.62 1577.62,4203.28 1595.81,4221.48 2091.43,4221.48 2103.15,4209.76 R11.2@2103.15,4182.1
  Top Layer w25: DA4.2@1402.08,4144.29 DA4.2 1434.26,4145.57 1468.41,4145.57 1493.83,4171 R12.1
NetDA4_3: DA4.3 R8.2 R9.1 | length 534.1
  Top Layer w25: DA4.3 1464.38,4194.29 1494.06,4223.98 1495.86,4223.98 1535.67,4263.78 1648.59,4263.78 1674.07,4289.26 1674.07,4356.08 1627.95,4402.2 R9.1 1625,4403.19 1625,4518.07 R8.2
NetDA4_5: DA4.5 DA6.7 | length 532.7
  Top Layer w20: 1236.07,4255.75 1251.97,4271.65 1251.97,4522.08 1263.68,4533.8 1444.9,4533.8 1456.88,4521.82 1456.88,4517.94 1473.82,4501 DA6.7
NetDA4_6: DA4.6 R10.2 R13.1 | length 2563.9
  Top Layer w20: R13.1 1162.97,4279.79 1162.97,4240.3 1207.76,4195.51 1236.87,4195.51 DA4.6 1318,4194.29 1363,4149.29 1363,4081.36 1336.64,4055 1065.73,4055 1054.02,4043.28 1054.02,3979.16 1065.73,3967.44 2617.44,3967.44 R10.2
NetDA6_3: DA6.3 DA6.4 X2.1 | length 401.5
  Top Layer w78.74: X2.1 1117.36,4523.15 1291.54,4697.32 DA6.4 1400.12,4697.32
NetL1_1: L1.1 R4.1 T1.3 VD2.2 VD3.2 VT1.3 | length 2510.5
  Top Layer w39.37: R4.1 T1.3 2225.42,6640 2407.57,6822.15
  Top Layer w80: 2460,6777.42 2741.99,6777.42 2820,6855.43 VD3.2
  Top Layer w100: VD2.2 2438.74,6104.6 L1.1 2460,6777.42 2408.89,6828.54 2408.89,6975.06 VT1.3
NetR3_1: R3.1 T1.1 | length 172.3
  Top Layer w39.37: T1.1 1991.15,6495.71 2145.33,6495.71 R3.1 ; R3.1@2176.79,6492.95 R3.1@2180,6489.75
NetR3_2: R3.2 R4.2 VD1.2 VT1.1 | length 1225
  Top Layer w50: VD1.2 1765.75,6109.72 1790.82,6109.72 1887.66,6206.56 1887.66,6777.42 1928.86,6818.62 1988.39,6818.62 R4.2 ; VT1.1 1987.21,6967.6 1987.21,6821.38 1988.59,6820 R4.2 ; R3.2 2125.97,6724.43 2031.77,6818.62 1991.15,6818.62 R4.2
NetR6_2: R6.2 R10.3 | length 401.3
  Top Layer w25: R10.3 2998.43,4151.57 2998.43,4548.43 R6.2
NetR7_2: R7.2 R10.1 | length 401.3
  Top Layer w25: R7.2 2600,4153.15 R10.1
NetVD1_1: VD1.1 VD2.1 | length 160
  Top Layer w50: VD1.1 VD2.1
VCC5: C16.2 C19.1 DA4.8 DA5.3 DA6.8 R6.1 R11.3 | length 3780.9
  Top Layer w25: DA4.8@1213.09,4094.29 DA4.8 1239.37,4095.57 1313.57,4095.57 v1(1318,4100) ; C16.2@1519.68,4402.2 1523.52,4406.04 1523.52,4483.48 DA6.8 1524.11,4484.07 v1(1524.11,4588.09) ; R11.3 2300,4585.41 2314.64,4600.06 2869.94,4600.06 2904.94,4565.06 2908.88,4565.06 2920,4553.94 R6.1
  Top Layer w78.74: DA5.3 1453.66,5309.45 1519.68,5243.42 1519.68,4929.13 C19.1
  Bottom Layer w78.74: v1(1318,4100) 1318,4121.38 1524.11,4327.5 v1(1524.11,4588.09) ; C19.1 1468.5,4643.7 v1(1524.11,4588.09) ; R11.3 2129.99,4320.01 1792.19,4320.01 v1(1524.11,4588.09)
VCC15: C1.1 C2.2 C3.2 C4.1 C12.1 C13.2 C15.2 C17.2 DA1.1 DA2.1 DA2.3 DA2.8 DA3.3 DA5.1 | length 4255.1
  Top Layer w25: C13.2 1359.69,5050.05 1359.69,5203.74 C15.2
  Top Layer w39.37: C4.1 1139.81,5070.48 1160.56,5049.73 C13.2 ; C1.1 1228.98,5440 1279.53,5490.55 DA5.1 1439.37,5490.55 1526.93,5578.11 C3.2 ; DA1.1 1527.24,5720 1527.24,5670.55
  Top Layer w50: C2.2 C2.2@1387.17,6250 ; DA2.3@1511.81,6250 DA2.3 C2.2@1387.17,6250 ; DA3.3 1650,6741.81 1557.79,6649.61 C12.1 1557.79,6406.38 ; 1688.98,6366.14 1598.03,6366.14 1557.79,6406.38 ; C2.2@1387.17,6250 1388.39,6251.22 1388.39,6304.9 1449.62,6366.14 1519.34,6366.14 1548.63,6395.43 1548.63,6397.21 1557.79,6406.38
  Bottom Layer w78.74: C4.1 C1.1 1139.81,5517.76 1343.07,5721.02 1343.07,6365.28 1649.02,6671.23 1649.02,6975.4 DA3.3
VCC40: C6.2 C7.1 C8.1 C9.2 DA3.1 VT1.2 X1.2 | length 4064.7
  Top Layer w39.37: C6.2 1447.72,6836.88 1447.72,6974.88 DA3.1 ; VT1.2 2193.63,6975.75 2193.63,6841.91 C9.2
  Bottom Layer w78.74: X1.2 1120,6476.85 C7.1 1234.41,6761.57 1451.77,6978.94 1451.77,7007.12 1458.31,7013.65 1458.31,7014.2 1534.4,7090.29 2079.08,7090.29 VT1.2 2907.64,6261.74 C8.1
pads on no net: T1.2 T1.5

## Polygon pours and split planes (outlines as drawn)
GND on Top Layer "GND_L01_P000" (solid, pour order 0): 800,3900 800,7860 3200,7860 3200,3900
GND on Bottom Layer "GNDBOTTOM" (solid, pour order 1): 800,3900 800,7860 3200,7860 3200,3900

## Keep-outs
Keep-Out Layer:
  lines w10: 0,0 9842.52,0 9842.52,7874.02 0,7874.02 0,0

## Other copper
Top Layer:
  region net NetC10_1: 1456.92,4668.48 1456.92,4731.48 1456.29,4732.11 1456.47,4732.28 1543.53,4732.28 1543.53,4668.48
  region net NetDA6_3: 1359.89,4732.15 1360.24,4731.79 1440.01,4731.79 1440.01,4668.17 1360.01,4668.17

## Silkscreen, mask and mechanical layers (free items; w line width, h text height)
Board Dimensions:
  the board outline again, w10
Board shape:
  the board outline again, w10

## Text inside footprints (layer, text, board x,y; h text height)
C1: Top Overlay "+" at 1128,5495.12 h40
C4: Top Overlay "+" at 1128,5135.12 h40
C7: Top Overlay "+" at 1175.12,6773.39 h40 r270
C8: Top Overlay "+" at 2895.83,5166.93 h40
C10: Top Overlay "+" at 2190.94,4870.08 h40
C12: Top Overlay "+" at 1545.98,6635.12 h40
C19: Top Overlay "+" at 1456.69,4927.17 h40